# EAGLE board SmartWatchPCB (EAGLE 9.7.0)
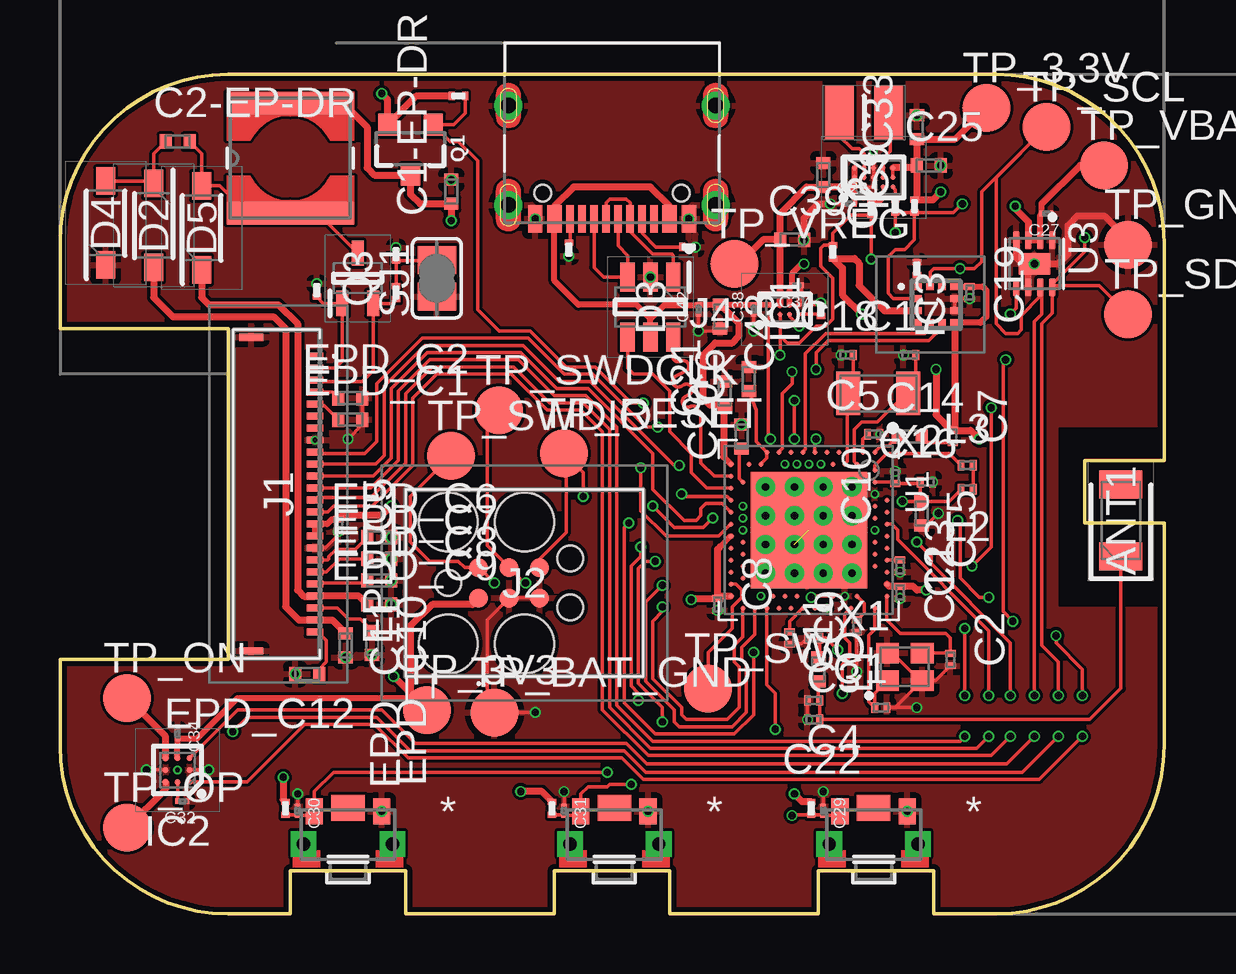
[diagram p0: board, top side]
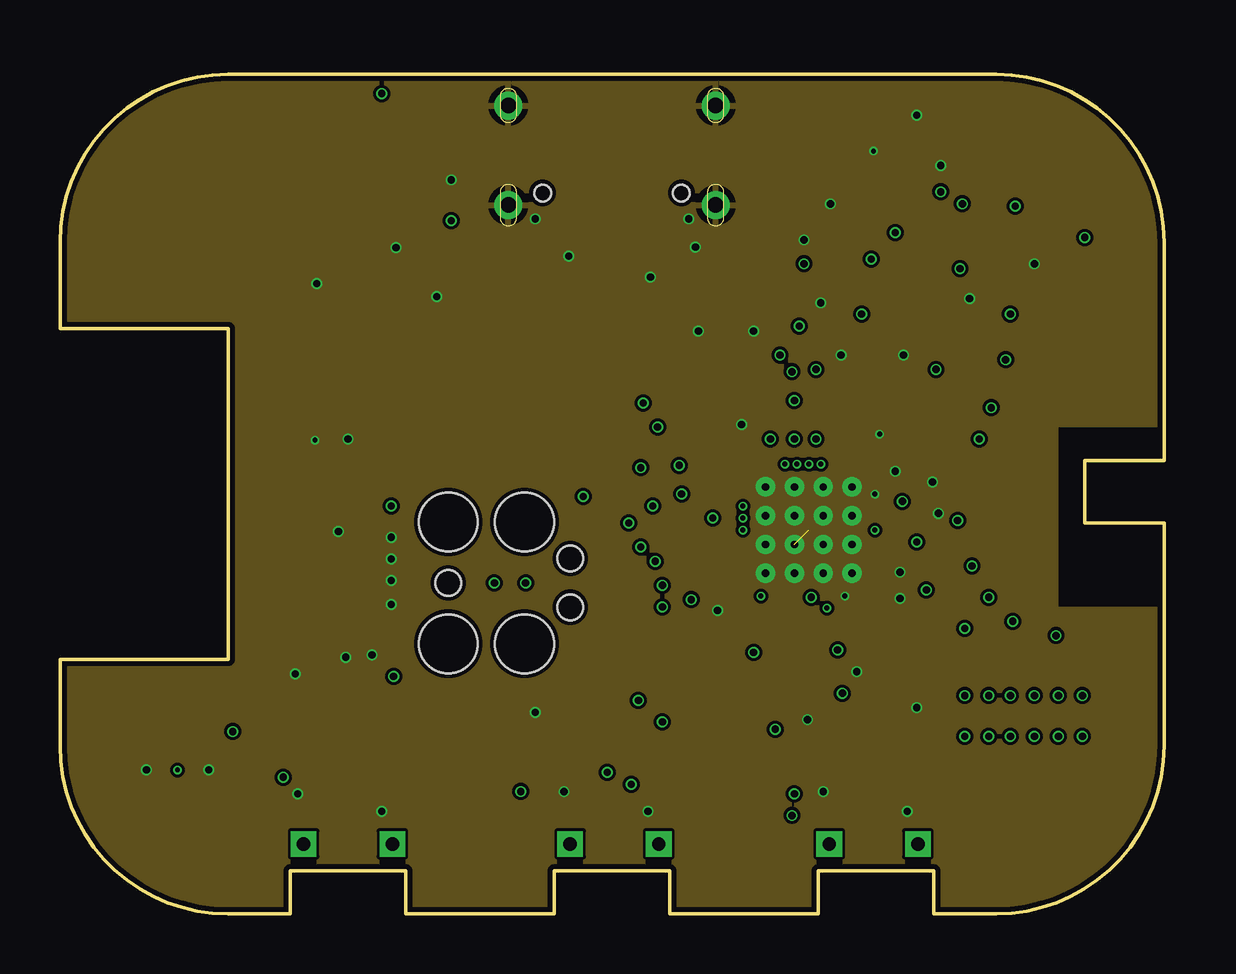
[diagram p1: board, inner layer Route2]
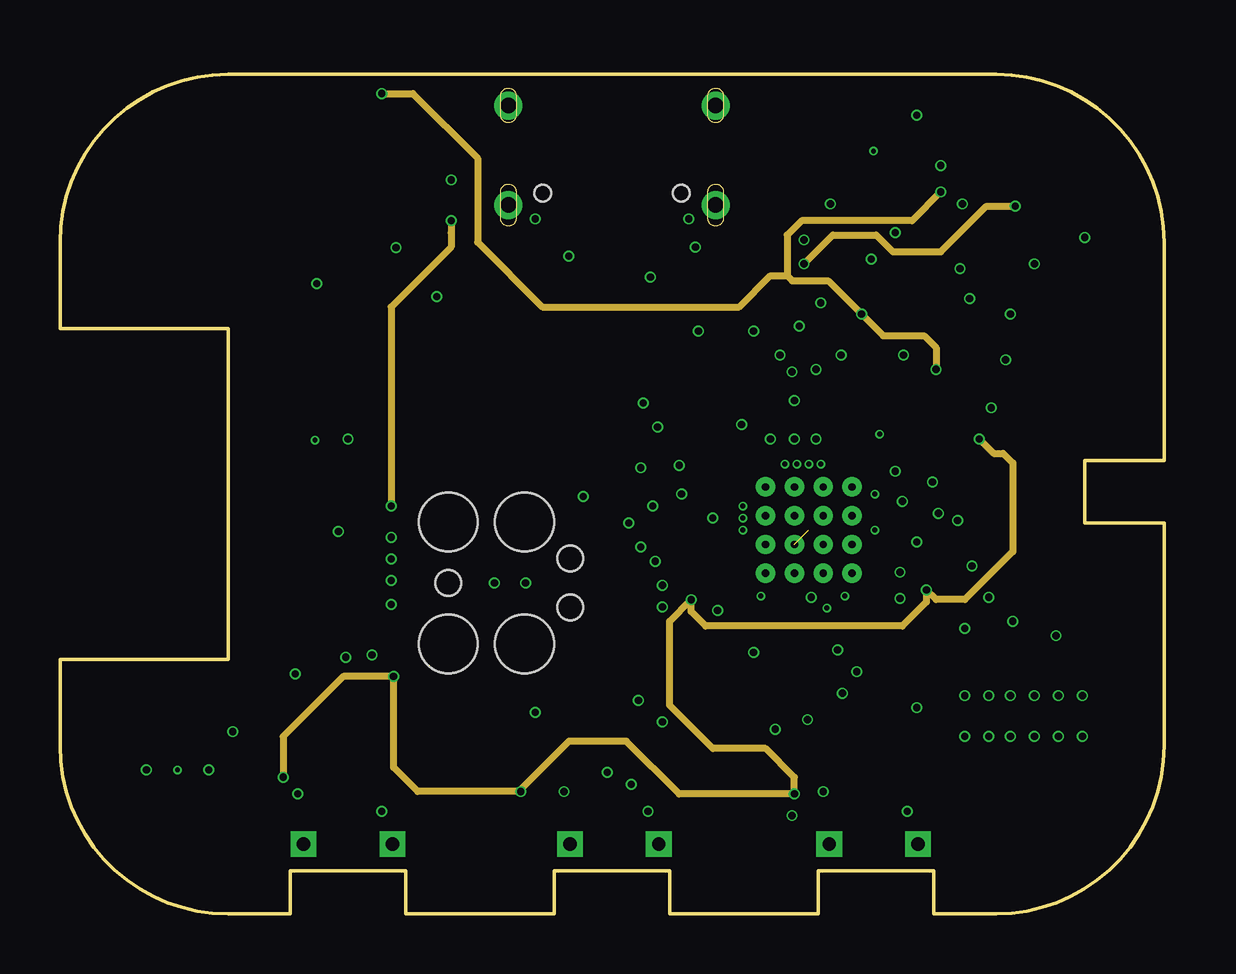
[diagram p2: board, inner layer Route15]
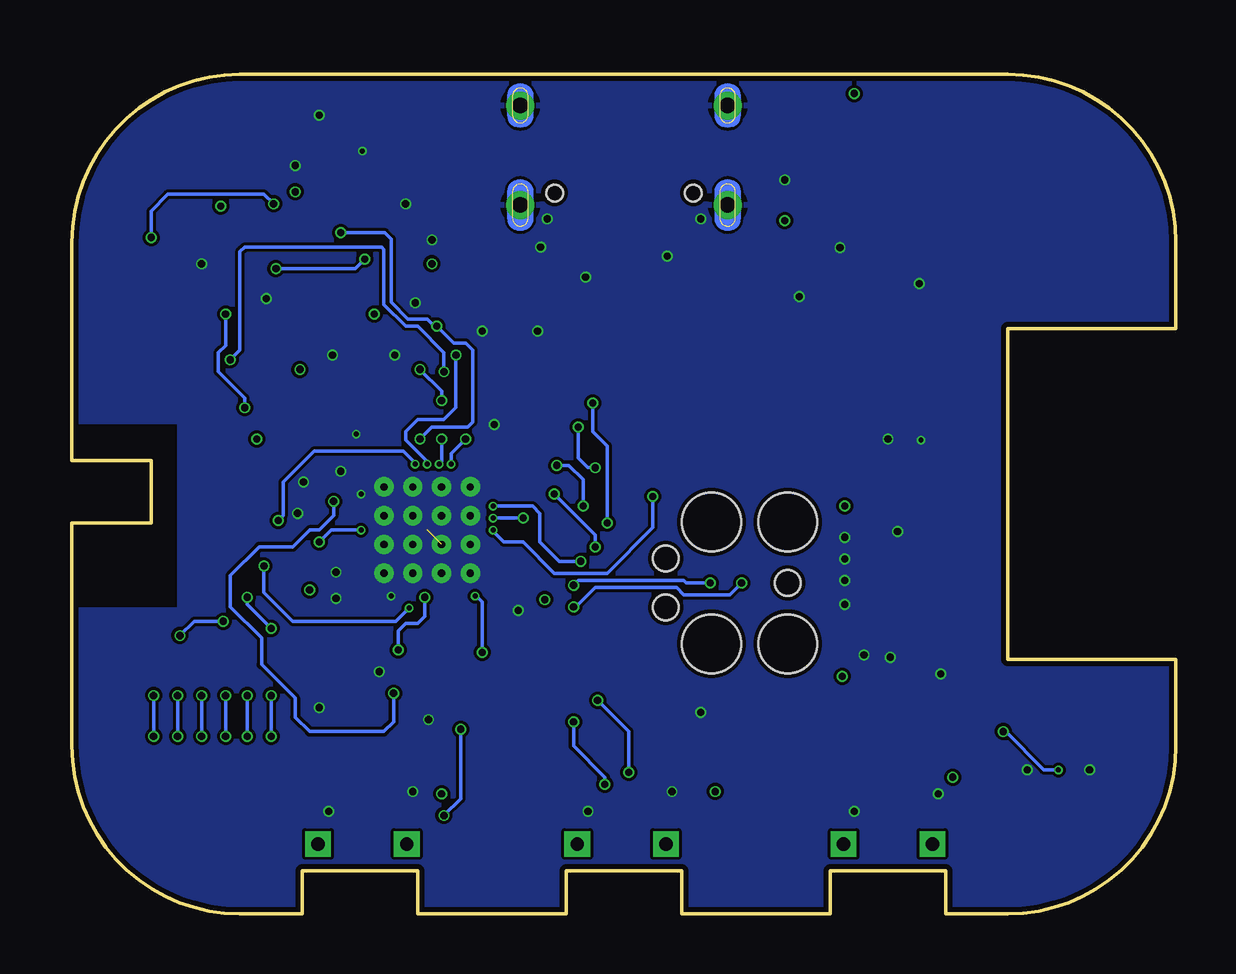
[diagram p3: board, bottom side, seen from below]

Size 46 x 35 mm. Coordinates in mm from the lower left corner, seen from the top.
Outline: 46,7 46,6.9
Outline: 46,7 46,16.3 42.7,16.3 42.7,18.9 46,18.9 46,28 arc90 39,35 7,35 arc90 0,28 0,24.4 7,24.4 7,10.6 0,10.6 0,7 arc90 7,0 9.6,0 9.6,1.8 14.4,1.8 14.4,0 20.6,0 20.6,1.8 25.4,1.8 25.4,0 31.6,0 31.6,1.8 36.4,1.8 36.4,0 39,0 arc90 46,7
Copper layers (1+2*15+16): Top 0.035mm / dielectric 1.6mm / Route2 0.035mm / dielectric 0.15mm / Route15 0.035mm / dielectric 0.2mm / Bottom 0.035mm
Design rules "jlcpcb-2layers.dru *": minimum track width 5mil, minimum drill 0.3mm, track to track 5mil, track to pad 5mil, pad to pad 5mil, via to via 5mil, smd to smd 5mil, copper to edge 0.2mm, drill to drill 6mil, minimum pad ring 10mil, minimum via ring 3mil, stop-mask expansion 4mil, vias tented up to drill 0mil, thermal gap 10mil

## Footprints (pad centres in the part's own frame; a part is rotated, then mirrored left to right if it is on the bottom)
2450AT18B100E_ANTC3216X140N = smd 1.15 x 1.8: 1 -1.5,0; 2 1.5,0
NORDIC_NRF_3_RESC0201_L = smd 0.28 x 0.43: 1 -0.255,0; 2 0.255,0
NORDIC_NRF_3_RESC0402_L = smd 0.5 x 0.6: 1 -0.5,0; 2 0.5,0
GRM011R60J152KE01L_2_CAPC0201X13N = smd 0.22 x 0.23: 1 -0.185,0; 2 0.185,0
ESP32_C6_LIBRARY_5_SOD3716X135N = smd 1.15 x 0.8: 1 -1.75,0; 2 1.75,0
ESP32_C6_LIBRARY_3_SOT95P280X145-6N = smd 1.2 x 0.6: 1 -1.25,0.95; 2 -1.25,0; 3 -1.25,-0.95; 4 1.25,-0.95; 5 1.25,0; 6 1.25,0.95
BQ25180YBGR_BGA8C40P2X4_100X155X50 = smd 0.2 x 0.2: A1 -0.2,0.6; A2 0.2,0.6; B1 -0.2,0.2; B2 0.2,0.2; C1 -0.2,-0.2; C2 0.2,-0.2; D1 -0.2,-0.6; D2 0.2,-0.6
DRV2605YZFR_BGA9C50P3X3_144X144X62 = smd 0.25 x 0.25: A1 -0.5,0.5; A2 0,0.5; A3 0.5,0.5; B1 -0.5,0; B2 0,0; B3 0.5,0; C1 -0.5,-0.5; C2 0,-0.5; C3 0.5,-0.5
BMA423_BMA423 = smd 0.3 x 0.35: 1 -0.75,-0.775; 2 -0.25,-0.775; 3 0.25,-0.775; 4 0.75,-0.775; 7 0.75,0.775; 8 0.25,0.775; 9 -0.25,0.775; 10 -0.75,0.775 | smd 0.35 x 0.3: 5 0.775,-0.25; 6 0.775,0.25; 11 -0.775,0.25; 12 -0.775,-0.25
RT6160AWSC_BGA15C40P3X5_140X230X60 = smd 0.216 x 0.216: A1 -0.4,0.8; A2 0,0.8; A3 0.4,0.8; B1 -0.4,0.4; B2 0,0.4; B3 0.4,0.4; C1 -0.4,0; C2 0,0; C3 0.4,0; D1 -0.4,-0.4; D2 0,-0.4; D3 0.4,-0.4; E1 -0.4,-0.8; E2 0,-0.8; E3 0.4,-0.8
503480-2400_5034802400 = smd 0.3 x 0.7: 1 -5.75,1.525; 2 -5.25,1.525; 3 -4.75,1.525; 4 -4.25,1.525; 5 -3.75,1.525; 6 -3.25,1.525; 7 -2.75,1.525; 8 -2.25,1.525; 9 -1.75,1.525; 10 -1.25,1.525; 11 -0.75,1.525; 12 -0.25,1.525; 13 0.25,1.525; 14 0.75,1.525; 15 1.25,1.525; 16 1.75,1.525; 17 2.25,1.525; 18 2.75,1.525; 19 3.25,1.525; 20 3.75,1.525; 21 4.25,1.525; 22 4.75,1.525; 23 5.25,1.525; 24 5.75,1.525 | smd 0.3 x 1: MP1 -6.54,-1.125; MP2 6.54,-1.125
TC2030-IDC_TC2030IDC = smd 0.783 x 0.783: 1 -0.953,-0.635; 2 -0.953,0.635; 3 0.317,-0.635; 4 0.317,0.635; 5 1.588,-0.635; 6 1.588,0.635 | hole 2.451: -2.223,-2.54; -2.223,2.54; 0.952,-2.54; 0.952,2.54 | hole 1.067: -2.223,0; 2.857,-1.016; 2.857,1.016
KH-TYPE-C-16P_KINGHELM_KH-TYPE-C-16P = smd 0.6 x 1.15: A1_B12 -3.2,4.725; A4_B9 -2.4,4.725; A9_B4 2.4,4.725; A12_B1 3.2,4.725 | smd 0.3 x 1.15: A5 -1.25,4.725; A6 -0.25,4.725; A7 0.25,4.725; A8 1.25,4.725; B5 1.75,4.725; B6 0.75,4.725; B7 -0.75,4.725; B8 -1.75,4.725 | drill 0.65 pad 1.05: SH1 -4.32,0; SH2 4.32,0; SH3 -4.32,4.15; SH4 4.32,4.15 | hole 0.7: -2.89,3.65; 2.89,3.65
NORDIC_NRF_2_RESC0402_L = smd 0.5 x 0.6: 1 -0.5,0; 2 0.5,0
NORDIC_NRF_2_RESC0201_L = smd 0.28 x 0.43: 1 -0.255,0; 2 0.255,0
ESP32_C6_LIBRARY_2_IND_4828-WE-TPC_WRE = smd 0.9 x 5.3: 1 -2.286,0; 2 2.286,0
MLP2016SR47MT0S1_INDC2016X100N = smd 1.2 x 2.2: 1 -1.028,0; 2 1.028,0
ESP32_C6_LIBRARY_4_ESP32_C6_LIBRARY_4_ESP32_C6_LIBRARY_4_ESP32_C6_LIBRARY_4_ESP32_WROVER_SPARKFUN-DISCRETESEMI_SOT23-3 = smd 0.8 x 0.9: 1 -0.95,-1; 2 0.95,-1; 3 0,1.1
ESP32_C6_LIBRARY_6_SOT65P210X110-3N = smd 1.05 x 0.5: 1 -1.05,0.65; 2 -1.05,-0.65; 3 1.05,0
CPF0201D7K68C1_0201 = smd 0.35 x 0.25: 1 0,0.275; 2 0,-0.275
ESP32_C6_LIBRARY_7_JUMPER_SJ = smd 1.168 x 1.6: 1 -0.762,0; 2 0.762,0
2025-10-22_07-23-44_LIBRARY_SW_EVP-AKE31A_PAN = smd 0.711 x 1.092: 1 -1.4,-0.972; 2 1.4,-0.972 | drill 0.559 pad 0.914 square: 3 -1.848,0.381; 4 1.848,0.381 | smd 1.397 x 1.092: 5 0,-1.124
HECTOR_WATCH_1_TP20R = smd 2 x 2: TP 0,0
NORDIC_NRF_4_AQFN50P700X700X85_HS-74N = smd 4.85 x 4.85: P$74 0,0 | drill 0.3 pad 0.6: P$75 -1.8,1.8; P$76 -0.6,1.8; P$77 0.6,1.8; P$78 1.8,1.8; P$79 -1.8,0.6; P$80 -0.6,0.6; P$81 0.6,0.6; P$82 1.8,0.6; P$83 -1.8,-0.6; P$84 -0.6,-0.6; P$85 0.6,-0.6; P$86 1.8,-0.6; P$87 -1.8,-1.8; P$88 -0.6,-1.8; P$89 0.6,-1.8; P$90 1.8,-1.8 | smd 0.2 x 0.2: P$A8 -1.25,3.25; P$A10 -0.75,3.25; P$A12 -0.25,3.25; P$A14 0.25,3.25; P$A16 0.75,3.25; P$A18 1.25,3.25; P$A20 1.75,3.25; P$A22 2.25,3.25; P$A23 2.75,3.25; P$AA24 3.25,-2.25; P$AB2 -2.75,-2.5; P$AC5 -2,-2.75; P$AC9 -1,-2.75; P$AC11 -0.5,-2.75; P$AC13 0,-2.75; P$AC15 0.5,-2.75; P$AC17 1,-2.75; P$AC19 1.5,-2.75; P$AC21 2,-2.75; P$AC24 3.25,-2.75; P$AD2 -2.75,-3.25; P$AD4 -2.25,-3.25; P$AD6 -1.75,-3.25; P$AD8 -1.25,-3.25; P$AD10 -0.75,-3.25; P$AD12 -0.25,-3.25; P$AD14 0.25,-3.25; P$AD16 0.75,-3.25; P$AD18 1.25,-3.25; P$AD20 1.75,-3.25; P$AD22 2.25,-3.25; P$AD23 2.75,-3.25; P$B1 -3.25,2.75; P$B3 -2.5,2.75; P$B5 -2,2.75; P$B7 -1.5,2.75; P$B9 -1,2.75; P$B11 -0.5,2.75; P$B13 0,2.75; P$B15 0.5,2.75; P$B17 1,2.75; P$B19 1.5,2.75; P$B24 3.25,2.75; P$C1 -3.25,2.25; P$D2 -2.75,2; P$D23 2.75,2; P$E24 3.25,1.75; P$F2 -2.75,1.5; P$F23 2.75,1.5; P$G1 -3.25,1.25; P$H2 -2.75,1; P$H23 2.75,1; P$J1 -3.25,0.75; P$J24 3.25,0.75; P$K2 -2.75,0.5; P$L1 -3.25,0.25; P$L24 3.25,0.25; P$M2 -2.75,0; P$N1 -3.25,-0.25; P$N24 3.25,-0.25; P$P2 -2.75,-0.5; P$P23 2.75,-0.5; P$R1 -3.25,-0.75; P$R24 3.25,-0.75; P$T2 -2.75,-1; P$T23 2.75,-1; P$U1 -3.25,-1.25; P$U24 3.25,-1.25; P$V23 2.75,-1.5; P$W1 -3.25,-1.75; P$W24 3.25,-1.75; P$Y2 -2.75,-2; P$Y23 2.75,-2
ESP32_C6_LIBRARY_SON50P200X200X80-9N = smd 0.76 x 0.27: 1 -0.985,0.75; 2 -0.985,0.25; 3 -0.985,-0.25; 4 -0.985,-0.75; 5 0.985,-0.75; 6 0.985,-0.25; 7 0.985,0.25; 8 0.985,0.75 | smd 0.9 x 1.3: 9 0,0
NORDIC_NRF_BT-XTAL_2016_N = smd 0.95 x 0.85: 1 -0.725,-0.575; 2 0.725,-0.575; 3 0.725,0.575; 4 -0.725,0.575
NORDIC_NRF_1_XTAL_3215_N = smd 1 x 1.8: 1 -1.25,0; 2 1.25,0

## Placement (x,y rotation side)
ANT1  2450AT18B100E  [2450AT18B100E_ANTC3216X140N]  44.2,16.4 90 top
C1  12pF  [NORDIC_NRF_3_RESC0201_L]  34.2,8.6 0 top
C1-EP-DR  10uF  [NORDIC_NRF_3_RESC0402_L]  16.3,30.1 90 top
C2  12pF  [NORDIC_NRF_3_RESC0201_L]  37.1,10.6 270 top
C2-EP-DR  4.7uF/25V  [NORDIC_NRF_3_RESC0402_L]  4.9,32.2 0 top
C3  1pF  [NORDIC_NRF_3_RESC0201_L]  31.4,11.5 180 top
C4  1pF  [NORDIC_NRF_3_RESC0201_L]  31.4,8.9 180 top
C5  100nF  [NORDIC_NRF_3_RESC0201_L]  33.9,20 0 top
C6  4.7uF  [NORDIC_NRF_3_RESC0402_L]  28.7,22.3 90 top
C7  100nF  [NORDIC_NRF_3_RESC0201_L]  37.2,19.9 270 top
C8  100nF  [NORDIC_NRF_3_RESC0201_L]  27.4,12.9 270 top
C9  820pF  [NORDIC_NRF_3_RESC0201_L]  30.4,11.5 270 top
C10  N.C.  [NORDIC_NRF_3_RESC0201_L]  34.8,18.2 90 top
C11  100pF  [NORDIC_NRF_3_RESC0201_L]  33.2,12 90 top
C12  100nF  [NORDIC_NRF_3_RESC0201_L]  35,13.4 270 top
C13  N.C.  [NORDIC_NRF_3_RESC0201_L]  35,14.5 270 top
C14  4.7uF  [NORDIC_NRF_3_RESC0402_L]  35.4,19.9 0 top
C15  1.0uF  [NORDIC_NRF_3_RESC0402_L]  35.9,16.7 270 top
C16  47nF  [NORDIC_NRF_3_RESC0201_L]  36.1,18 0 top
C17  12pF  [NORDIC_NRF_3_RESC0201_L]  35.4,23.3 0 top
C18  12pF  [NORDIC_NRF_3_RESC0201_L]  32.8,23.3 0 top
C19  100nF  [NORDIC_NRF_3_RESC0201_L]  37.9,25.9 270 top
C20  4.7uF  [NORDIC_NRF_3_RESC0402_L]  28.4,19.9 90 top
C21  4.7uF  [NORDIC_NRF_3_RESC0402_L]  27.7,21.7 90 top
C22  N.C.  [NORDIC_NRF_3_RESC0201_L]  31.4,8.1 180 top
C23  0.1uF  [GRM011R60J152KE01L_2_CAPC0201X13N]  32.9,29.6 0 top
C24  10uF  [NORDIC_NRF_3_RESC0402_L]  31.8,30.8 270 top
C25  22uF  [NORDIC_NRF_3_RESC0402_L]  36.2,31.2 0 top
C27  0.1uF  [GRM011R60J152KE01L_2_CAPC0201X13N]  41.1,29.2 180 top
C29  1uF  [GRM011R60J152KE01L_2_CAPC0201X13N]  31.8,4.3 270 top
C30  1uF  [GRM011R60J152KE01L_2_CAPC0201X13N]  9.9,4.3 270 top
C31  1uF  [GRM011R60J152KE01L_2_CAPC0201X13N]  21,4.3 270 top
C32  1uF  [GRM011R60J152KE01L_2_CAPC0201X13N]  5.1,4.7 180 top
C33  22uF  [NORDIC_NRF_3_RESC0402_L]  35.7,32.8 90 top
C34  0.1uF  [GRM011R60J152KE01L_2_CAPC0201X13N]  4.9,7.5 270 top
C37  1uF  [GRM011R60J152KE01L_2_CAPC0201X13N]  30.7,26.2 180 top
C38  1uF  [GRM011R60J152KE01L_2_CAPC0201X13N]  28.9,25.2 90 top
C39  10uF  [NORDIC_NRF_3_RESC0402_L]  30.5,28.1 0 top
C42  0.1uF  [GRM011R60J152KE01L_2_CAPC0201X13N]  26.6,25.2 90 top
C43  4.7uF  [NORDIC_NRF_3_RESC0402_L]  27.5,24.9 270 top
D2  MBR0530  [ESP32_C6_LIBRARY_5_SOD3716X135N]  3.9,28.7 270 top
D3  USBLC6-2SC6Y  [ESP32_C6_LIBRARY_3_SOT95P280X145-6N]  24.6,25.3 270 top
D4  MBR0530  [ESP32_C6_LIBRARY_5_SOD3716X135N]  1.9,28.8 90 top
D5  MBR0530  [ESP32_C6_LIBRARY_5_SOD3716X135N]  5.9,28.6 90 top
EPD_C1  1uF/50V  [NORDIC_NRF_3_RESC0402_L]  12.1,20.6 0 top
EPD_C2  1uF/50V  [NORDIC_NRF_3_RESC0402_L]  12.1,21.5 0 top
EPD_C5  0.1uF/50V  [NORDIC_NRF_3_RESC0201_L]  11.6,16.2 270 top
EPD_C6  1uF/50V  [NORDIC_NRF_3_RESC0402_L]  13.3,15.7 0 top
EPD_C7  1uF/50V  [NORDIC_NRF_3_RESC0402_L]  13.3,14.8 0 top
EPD_C8  1uF/50V  [NORDIC_NRF_3_RESC0402_L]  13.3,13.9 0 top
EPD_C9  1uF/50V  [NORDIC_NRF_3_RESC0402_L]  13.3,12.9 0 top
EPD_C10  1uF/50V  [NORDIC_NRF_3_RESC0402_L]  13,11.3 270 top
EPD_C11  1uF/50V  [NORDIC_NRF_3_RESC0402_L]  11.9,11.2 270 top
EPD_C12  1uF/50V  [NORDIC_NRF_3_RESC0402_L]  10.3,10 180 top
IC1  BQ25180YBGR  [BQ25180YBGR_BGA8C40P2X4_100X155X50]  30.2,25.2 90 top
IC2  DRV2605YZFR  [DRV2605YZFR_BGA9C50P3X3_144X144X62]  4.9,6 180 top
IC3  BMA423_BMA423  [BMA423_BMA423]  36.5,25.4 270 top
IC9  RT6160AWSC  [RT6160AWSC_BGA15C40P3X5_140X230X60]  33.9,30.7 90 top
J1  503480-2400  [503480-2400_5034802400]  9.1,17.5 270 top
J2  TC2030-IDC  [TC2030-IDC_TC2030IDC]  18.4,13.8 0 top
J4  KH-TYPE-C-16P  [KH-TYPE-C-16P_KINGHELM_KH-TYPE-C-16P]  23,33.7 180 top
L1  3.9nH  [NORDIC_NRF_2_RESC0402_L]  31.6,10.2 270 top
L2  10uH  [NORDIC_NRF_2_RESC0201_L]  37.8,18.7 0 top
L3  15nH  [NORDIC_NRF_2_RESC0201_L]  37.8,17.7 180 top
L5  48uH  [ESP32_C6_LIBRARY_2_IND_4828-WE-TPC_WRE]  9.6,31.5 90 top
L7  FTC252012SR47MBCA  [MLP2016SR47MT0S1_INDC2016X100N]  33.5,33.4 0 top
Q1  20V/4.2A/52mΩ/1.4W  [ESP32_C6_LIBRARY_4_ESP32_C6_LIBRARY_4_ESP32_C6_LIBRARY_4_ESP32_C6_LIBRARY_4_ESP32_WROVER_SPARKFUN-DISCRETESEMI_SOT23-3]  14.6,31.9 180 top
Q3  SI1308EDL-T1-GE3  [ESP32_C6_LIBRARY_6_SOT65P210X110-3N]  12.4,26.5 90 top
R1_EP_DR  0.47  [CPF0201D7K68C1_0201]  14,25.9 0 top
R1_USB  5K1  [CPF0201D7K68C1_0201]  26.2,27.8 270 top
R2  0  [CPF0201D7K68C1_0201]  34.8,29.5 180 top
R2_EP_DR  10k  [CPF0201D7K68C1_0201]  10.7,26 0 top
R2_USB  5K1  [CPF0201D7K68C1_0201]  21.2,27.7 0 top
R3  0  [CPF0201D7K68C1_0201]  35.7,26.9 0 top
R4  0  [CPF0201D7K68C1_0201]  33.8,29.4 180 top
R5  10k  [CPF0201D7K68C1_0201]  9.4,4.4 180 top
R7  10k  [CPF0201D7K68C1_0201]  31.3,4.4 180 top
R8  10k  [CPF0201D7K68C1_0201]  20.5,4.4 180 top
R9  10K  [CPF0201D7K68C1_0201]  31.7,25.2 0 top
R17  3k3  [CPF0201D7K68C1_0201]  32.2,27.6 180 top
R18  3K3  [CPF0201D7K68C1_0201]  35.6,29.5 0 top
R_PWR_EPD  10k  [CPF0201D7K68C1_0201]  16.6,34.1 270 top
R_TYPE_SEL  2.2  [CPF0201D7K68C1_0201]  14,27.5 0 top
SJ1  [ESP32_C6_LIBRARY_7_JUMPER_SJ]  15.7,26.5 90 top
SW_DN  EVP-AKE31A_PAN  [2025-10-22_07-23-44_LIBRARY_SW_EVP-AKE31A_PAN]  33.9,3.3 180 top
SW_ENT  EVP-AKE31A_PAN  [2025-10-22_07-23-44_LIBRARY_SW_EVP-AKE31A_PAN]  23.1,3.3 180 top
SW_UP  EVP-AKE31A_PAN  [2025-10-22_07-23-44_LIBRARY_SW_EVP-AKE31A_PAN]  12,3.3 180 top
TP_3.3V  HECTOR_WATCH_1_TPTP20R  [HECTOR_WATCH_1_TP20R]  38.6,33.6 0 top
TP_3V3  HECTOR_WATCH_1_TPTP20R  [HECTOR_WATCH_1_TP20R]  15.3,8.5 0 top
TP_BAT_GND  HECTOR_WATCH_1_TPTP20R  [HECTOR_WATCH_1_TP20R]  18.1,8.4 0 top
TP_GND  HECTOR_WATCH_1_TPTP20R  [HECTOR_WATCH_1_TP20R]  44.5,27.9 0 top
TP_ON  HECTOR_WATCH_1_TPTP20R  [HECTOR_WATCH_1_TP20R]  2.8,9 0 top
TP_OP  HECTOR_WATCH_1_TPTP20R  [HECTOR_WATCH_1_TP20R]  2.8,3.6 0 top
TP_RESET  HECTOR_WATCH_1_TPTP20R  [HECTOR_WATCH_1_TP20R]  21,19.2 0 top
TP_SCL  HECTOR_WATCH_1_TPTP20R  [HECTOR_WATCH_1_TP20R]  41.1,32.8 0 top
TP_SDA  HECTOR_WATCH_1_TPTP20R  [HECTOR_WATCH_1_TP20R]  44.5,25 0 top
TP_SWDCLK  HECTOR_WATCH_1_TPTP20R  [HECTOR_WATCH_1_TP20R]  18.3,21 0 top
TP_SWDIO  HECTOR_WATCH_1_TPTP20R  [HECTOR_WATCH_1_TP20R]  16.3,19.1 0 top
TP_SWO  HECTOR_WATCH_1_TPTP20R  [HECTOR_WATCH_1_TP20R]  27,9.4 0 top
TP_VBAT  HECTOR_WATCH_1_TPTP20R  [HECTOR_WATCH_1_TP20R]  43.5,31.2 0 top
TP_VREG  HECTOR_WATCH_1_TPTP20R  [HECTOR_WATCH_1_TP20R]  28.1,27.1 0 top
U1  NRF52840_QF  [NORDIC_NRF_4_AQFN50P700X700X85_HS-74N]  31.2,16 270 top
U3  MAX17048G+T10  [ESP32_C6_LIBRARY_SON50P200X200X80-9N]  40.6,27.1 270 top
X1  32MHz  [NORDIC_NRF_BT-XTAL_2016_N]  35.2,10.3 0 top
X2  32.768kHz  [NORDIC_NRF_1_XTAL_3215_N]  34.1,21.7 180 top

## Library data of the parts
ANT1 = InkTime_v5; ARROW_PART_NUMBER: 2450AT18B100E; ARROW_PRICE-STOCK: https://www.arrow.com/en/products/2450at18b100e/johanson-dielectrics?utm_currency=USD&region=nac; DESCRIPTION: Antennas 2.45GHz ANTENNA; HEIGHT: 1.4mm; MANUFACTURER_NAME: JOHANSON TECHNOLOGY; MANUFACTURER_PART_NUMBER: 2450AT18B100E; MOUSER_PART_NUMBER: 609-2450AT18B100E; MOUSER_PRICE-STOCK: https://www.mouser.co.uk/ProductDetail/Johanson-Technology/2450AT18B100E?qs=yCnrNFeXz%252Bh5MFsFIXGZGA%3D%3D
C1 C1-EP-DR C2 C2-EP-DR C3-C22 C24 C25 C33 C39 C43 EPD_C1 EPD_C2 EPD_C5-EPD_C12 L1-L3 R1_EP_DR R1_USB R2 R2_EP_DR R2_USB R3-R5 R7-R9 R17 R18 R_PWR_EPD R_TYPE_SEL SJ1 TP_3.3V TP_3V3 TP_BAT_GND TP_GND TP_ON TP_OP TP_RESET TP_SCL TP_SDA TP_SWDCLK TP_SWDIO TP_SWO TP_VBAT TP_VREG U1 X1 X2 = InkTime_v5
C23 C27 C29-C32 C34 C37 C38 C42 = InkTime_v5; AVAILABILITY: In Stock; CHECK_PRICES: https://www.snapeda.com/parts/GRM011R60J152KE01L/Murata/view-part/?ref=eda; DESCRIPTION: SMD Capacitor X5R(EIA) with Capacitance: 1500pF Tol. 10%. Rated Voltage: 6.3Vdc; MF: Murata; MP: GRM011R60J152KE01L; PACKAGE: 0201 Murata; PRICE: None; SNAPEDA_LINK: https://www.snapeda.com/parts/GRM011R60J152KE01L/Murata/view-part/?ref=snap
D2 D4 D5 = InkTime_v5; AVAILABILITY: In Stock; CHECK_PRICES: https://www.snapeda.com/parts/MBR0530/Onsemi/view-part/?ref=eda; DESCRIPTION: Diode Schottky 30 V 500mA Surface Mount SOD-123; MF: ON Semiconductor; MP: MBR0530; PACKAGE: SOD-123-2 ON Semiconductor; PRICE: None; PURCHASE-URL: https://www.snapeda.com/api/url_track_click_mouser/?unipart_id=179458&manufacturer=ON Semiconductor&part_name=MBR0530&search_term=None; SNAPEDA_LINK: https://www.snapeda.com/parts/MBR0530/Onsemi/view-part/?ref=snap
D3 = InkTime_v5; AVAILABILITY: In Stock; CHECK_PRICES: https://www.snapeda.com/parts/USBLC6-2SC6Y/STMicroelectronics/view-part/?ref=eda; DESCRIPTION: 17V Clamp 5A (8/20µs) Ipp Tvs Diode Surface Mount SOT-23-6; MF: STMicroelectronics; MP: USBLC6-2SC6Y; PACKAGE: SOT-23-6 STMicroelectronics; PRICE: None; SNAPEDA_LINK: https://www.snapeda.com/parts/USBLC6-2SC6Y/STMicroelectronics/view-part/?ref=snap
IC1 = InkTime_v5; ARROW_PART_NUMBER: BQ25180YBGR; ARROW_PRICE-STOCK: https://www.arrow.com/en/products/bq25180ybgr/texas-instruments?utm_currency=USD&region=nac; DESCRIPTION: Charger IC Lithium Ion/Polymer, Lithium Iron Phosphate 8-DSBGA (1.6x1.1); HEIGHT: 0.5mm; MANUFACTURER_NAME: Texas Instruments; MANUFACTURER_PART_NUMBER: BQ25180YBGR; MOUSER_PART_NUMBER: 595-BQ25180YBGR; MOUSER_PRICE-STOCK: https://www.mouser.co.uk/ProductDetail/Texas-Instruments/BQ25180YBGR?qs=doiCPypUmgEWjAK%252BJAX6Tw%3D%3D
IC2 = InkTime_v5; ARROW_PART_NUMBER: DRV2605YZFR; ARROW_PRICE-STOCK: https://www.arrow.com/en/products/drv2605yzfr/texas-instruments?region=nac; DESCRIPTION: Haptic Driver for ERM/LRA with Built-In Library and Smart Loop Architecture; HEIGHT: 0.625mm; MANUFACTURER_NAME: Texas Instruments; MANUFACTURER_PART_NUMBER: DRV2605YZFR
IC3 = InkTime_v5; ARROW_PART_NUMBER: BMA423; ARROW_PRICE-STOCK: https://www.arrow.com/en/products/bma423/bosch; DESCRIPTION: Accelerometers Triaxial low-g 12bit Acceleration Sensor; HEIGHT: 1mm; MANUFACTURER_NAME: BOSCH; MANUFACTURER_PART_NUMBER: BMA423; MOUSER_PART_NUMBER: 262-BMA423; MOUSER_PRICE-STOCK: https://www.mouser.co.uk/ProductDetail/Bosch-Sensortec/BMA423?qs=HXFqYaX1Q2xC%252BSgeGoX3mg%3D%3D
IC9 = InkTime_v5; DESCRIPTION: Buck-Boost Regulator Positive Output Step-Up/Step-Down I2C DC-DC Controller IC 15-WL-CSP (BSC) (1.4x2.3); HEIGHT: 0.6mm; MANUFACTURER_NAME: RICHTEK; MANUFACTURER_PART_NUMBER: RT6160AWSC; MOUSER_PART_NUMBER: 835-RT6160AWSC; MOUSER_PRICE-STOCK: https://www.mouser.co.uk/ProductDetail/Richtek/RT6160AWSC?qs=amGC7iS6iy%2FLd9PSoixZXQ%3D%3D
J1 = InkTime_v5; DESCRIPTION: FFC & FPC Connectors 0.5mm FPC RA SMT Dual Contact 24Ckt; HEIGHT: 1.87mm; MANUFACTURER_NAME: Molex; MANUFACTURER_PART_NUMBER: 503480-2400; MOUSER_PART_NUMBER: 538-503480-2400; MOUSER_PRICE-STOCK: https://www.mouser.co.uk/ProductDetail/Molex/503480-2400?qs=OAhjpuo3Vu7efIoxFh9AOw%3D%3D
J2 = InkTime_v5; DESCRIPTION: CABLE ADAPTER 6 POS; HEIGHT: 19mm; MANUFACTURER_NAME: Tag Connect; MANUFACTURER_PART_NUMBER: TC2030-IDC
J4 = InkTime_v5; AVAILABILITY: Not in stock; CHECK_PRICES: https://www.snapeda.com/parts/KH-TYPE-C-16P/Kinghelm/view-part/?ref=eda; MF: kinghelm; MP: KH-TYPE-C-16P; PACKAGE: None; PRICE: None; SNAPEDA_LINK: https://www.snapeda.com/parts/KH-TYPE-C-16P/Kinghelm/view-part/?ref=snap
L5 = InkTime_v5; COPYRIGHT: Copyright (C) 2024 Ultra Librarian. All rights reserved.; MANUFACTURER_PART_NUMBER: 744043680; MFR_NAME: Wurth Electronics
L7 = InkTime_v5; DESCRIPTION: SMD / SMT Inductors (Coils), L=0.47?H, L x W x T :; HEIGHT: 1mm; JLCPCB: https://jlcpcb.com/partdetail/6763488-FTC252012SR47MBCA/C5832368; MANUFACTURER_NAME: TDK; MANUFACTURER_PART_NUMBER: FTC252012SR47MBCA
Q1 = InkTime_v5; PROD_ID: TRAN-14388
Q3 = InkTime_v5; AVAILABILITY: In Stock; CHECK_PRICES: https://www.snapeda.com/parts/SI1308EDL-T1-GE3/Vishay+Siliconix/view-part/?ref=eda; DESCRIPTION: Si1308EDL-T1-GE3 N-channel MOSFET Transistor, 1.5 A, 30 V, 3-Pin SC-70 | Siliconix / Vishay SI1308EDL-T1-GE3; MF: Vishay Siliconix; MP: SI1308EDL-T1-GE3; PACKAGE: SOT-323 Vishay Semiconductor; PRICE: None; PURCHASE-URL: https://www.snapeda.com/api/url_track_click_mouser/?unipart_id=274603&manufacturer=Vishay Siliconix&part_name=SI1308EDL-T1-GE3&search_term=None; SNAPEDA_LINK: https://www.snapeda.com/parts/SI1308EDL-T1-GE3/Vishay+Siliconix/view-part/?ref=snap
SW_DN SW_ENT SW_UP = InkTime_v5; COPYRIGHT: Copyright (C) 2025 Ultra Librarian. All rights reserved.; DIGI-KEY_PART_NUMBER_1: P123437TR-ND; DIGI-KEY_PART_NUMBER_2: P123437CT-ND; DIGI-KEY_PART_NUMBER_3: P123437DKR-ND; MANUFACTURER_NAME: Panasonic; MANUFACTURER_PART_NUMBER: EVP-AKE31A
U3 = InkTime_v5; AVAILABILITY: In Stock; CHECK_PRICES: https://www.snapeda.com/parts/MAX17048G+T10/Analog+Devices/view-part/?ref=eda; DESCRIPTION: 3µA 1-Cell/2-Cell Fuel Gauge with ModelGauge; MF: Analog Devices; MP: MAX17048G+T10; PACKAGE: TDFN-8 Maxim; PRICE: None; PURCHASE-URL: https://www.snapeda.com/api/url_track_click_mouser/?unipart_id=329239&manufacturer=Analog Devices&part_name=MAX17048G+T10&search_term=None; SNAPEDA_LINK: https://www.snapeda.com/parts/MAX17048G+T10/Analog+Devices/view-part/?ref=snap

## Nets
3V3: C7.1 C8.1 C12.1 C19.1 C25.1 C33.1 C34.2 IC2.C2 IC3.3 IC3.7 IC3.10 IC9.E2 IC9.E3 J2.1 Q1.2 R5.2 R7.2 R8.2 R17.1 R18.1 R_PWR_EPD.2 TP_3.3V.TP TP_3V3.TP U1.P$A22 U1.P$AD14 U1.P$AD23
ALERT: U1.P$J24 U3.5
D+: D3.4 U1.P$AD6
D-: D3.6 U1.P$AD4
DEC1: C5.1 U1.P$C1
DN: D3.1 J4.A7 J4.B7
DP: D3.3 J4.A6 J4.B6
EPD_3V3: C1-EP-DR.1 EPD_C5.1 J1.15 J1.16 L5.2 Q1.3
EPD_BUSY: J1.9 U1.P$AD12
EPD_CS: J1.12 U1.P$K2
EPD_DC: J1.11 U1.P$AD10
EPD_RST: J1.10 U1.P$AC11
GDR: J1.2 Q3.1 R2_EP_DR.2
GND: C1-EP-DR.2 C1.2 C2.2 C3.2 C4.2 C5.2 C6.2 C8.2 C9.2 C10.2 C11.1 C12.2 C13.2 C15.2 C16.2 C17.1 C18.1 C19.2 C20.2 C21.2 C22.2 C23.1 C24.1 C25.2 C27.1 C29.1 C30.1 C31.1 C32.1 C33.2 C34.1 C37.1 C38.1 C39.2 C42.1 C43.2 D3.2 D4.1 EPD_C1.2 EPD_C2.2 EPD_C5.2 EPD_C6.2 EPD_C7.2 EPD_C8.2 EPD_C9.2 EPD_C10.2 EPD_C11.2 EPD_C12.2 IC1.D2 IC2.B1 IC2.B3 IC3.8 IC3.9 IC9.B1 IC9.C1 IC9.C2 IC9.C3 J1.8 J1.17 J1.MP1 J1.MP2 J2.3 J2.5 J4.A1_B12 J4.A12_B1 J4.SH1 J4.SH2 J4.SH3 J4.SH4 R1_USB.1 R2_EP_DR.1 R2_USB.2 R3.1 R9.1 R_TYPE_SEL.1 SJ1.1 SW_DN.1 SW_ENT.1 SW_UP.1 TP_BAT_GND.TP TP_GND.TP U1.P$74 U1.P$75 U1.P$76 U1.P$77 U1.P$78 U1.P$79 U1.P$80 U1.P$81 U1.P$82 U1.P$83 U1.P$84 U1.P$85 U1.P$86 U1.P$87 U1.P$88 U1.P$89 U1.P$90 U1.P$B7 U1.P$F23 U3.1 U3.4 U3.6 U3.9 X1.2 X1.4
HAPTIC_EN: IC2.A1 U1.P$U1
IMU_INT1: IC3.5 U1.P$N1
IMU_INT2: IC3.6 U1.P$P2
LX1: IC9.B2 IC9.B3 L7.1
LX2: IC9.D2 IC9.D3 L7.2
MOSI: J1.14 U1.P$B13
N$1: IC1.D1 R9.2
N$3: IC9.D1 R4.2
N$4: IC9.E1 R2.2
N$5: IC3.1 R3.2
N$8: C20.1 U1.P$AC5
N$15: C17.2 U1.P$D2 X2.1
N$17: C18.2 U1.P$F2 X2.2
N$18: C6.1 U1.P$W1 U1.P$Y2
N$20: C7.2 C14.2
N$21: C14.1 U1.P$B1
N$22: L2.1 U1.P$B3
N$23: L2.2 L3.1
N$24: C10.1 C15.1 C16.1 L3.2 U1.P$B5 U1.P$E24
N$25: C1.1 U1.P$B24 X1.1
N$26: C2.1 U1.P$A23 X1.3
N$27: C11.2 U1.P$D23
N$28: C3.1 L1.1 U1.P$H23
N$29: ANT1.1 C4.1 C22.1 L1.2
N$30: C9.1 U1.P$N24
N$31: C2-EP-DR.2 D5.2 L5.1 Q3.3
N$32: C2-EP-DR.1 D2.1 D4.2
N$36: EPD_C1.1 J1.5
N$39: C13.1 U1.P$A18
N$41: R1_EP_DR.1 R_TYPE_SEL.2 SJ1.2
N$42: EPD_C2.1 J1.4
N$46: U1.P$AC19
N$52: C32.2 IC2.A2
N$57: J4.B5 R2_USB.1
N$62: J4.A5 R1_USB.2
N$64: EPD_C6.1 J1.18
N$65: EPD_C7.1 J1.19
N$66: EPD_C8.1 J1.20
N$68: EPD_C10.1 J1.22
N$70: EPD_C12.1 J1.24
OUT+: IC2.A3 TP_OP.TP
OUT-: IC2.C3 TP_ON.TP
P0.04: U1.P$J1
P0.09: U1.P$L24
P0.13: C30.2 R5.1 SW_UP.2 U1.P$AD8
P0.14: C31.2 R8.1 SW_ENT.2 U1.P$AC9
P0.19: U1.P$AC15
P0.20: U1.P$AD16
P0.21: U1.P$AC17
P0.22: U1.P$AD18
P0.24: U1.P$AD20
P0.25: U1.P$AC21
P0.26: U1.P$G1
P0.27: U1.P$H2
P0.28: U1.P$B11
P0.29: U1.P$A10
P0.30: U1.P$B9
P0.31: U1.P$A8
P1.01: Q1.1 R_PWR_EPD.1 U1.P$Y23
P1.02: C29.2 R7.1 SW_DN.2 U1.P$W24
P1.03: U1.P$V23
P1.04: U1.P$U24
P1.05: U1.P$T23
P1.06: U1.P$R24
P1.07: U1.P$P23
P1.09: U1.P$R1
P1.10: U1.P$A20
P1.11: U1.P$B19
P1.12: U1.P$B17
P1.13: U1.P$A16
P1.14: U1.P$B15
P1.15: U1.P$A14
PMIC_INT: IC1.A1 U1.P$T2
PREVGH: D5.1 EPD_C9.1 J1.21
PREVGL: D2.2 EPD_C11.1 J1.23
RESE: J1.3 Q3.2 R1_EP_DR.2
RESET: J2.6 TP_RESET.TP U1.P$AC13
SCK: J1.13 U1.P$A12
SCL: IC1.B1 IC2.C1 IC3.12 R4.1 R17.2 TP_SCL.TP U1.P$M2 U3.7
SDA: IC1.C1 IC2.B2 IC3.2 R2.1 R18.2 TP_SDA.TP U1.P$L1 U3.8
SWDCLK: J2.4 TP_SWDCLK.TP U1.P$AA24
SWDIO: J2.2 TP_SWDIO.TP U1.P$AC24
SWO: TP_SWO.TP U1.P$AD22
VBAT: C27.2 C37.2 IC1.C2 TP_VBAT.TP U3.2 U3.3
VBUS: C21.1 C38.2 C42.2 C43.1 D3.5 IC1.A2 J4.A4_B9 J4.A9_B4 U1.P$AD2
VREG: C23.2 C24.2 C39.1 IC1.B2 IC9.A1 IC9.A2 IC9.A3 TP_VREG.TP

## Tracks (layer width: path | path; a pad name or v marks a point on that pad's centre or on a via)
3V3  (via drill 0.3)
  Top 0.152: IC9.E3 IC9.E2 | U1.P$AD23
  Top 0.24: IC3.10 C19.1 38.45,26.16 38.6,26 38.6,24.9 38.35,24.65 IC3.7 | IC2.C2 4.89,6.52 C34.2 5.68,7.31 5.7,7.3 7.4,9 14.8,9 TP_3V3.TP | U1.P$AD14 27.5,15.3
  Top 0.3: U1.P$A22 34.55,13.65 C12.1 35.55,13.65 35.7,13.5 v36.1,13.5 | C8.1 27.5,13.25 U1.P$AD23 | C7.1 37.27,20.16 IC3.7 | R_PWR_EPD.2 14.85,34.1 Q1.2 13.65,33.95 v13.4,34.2 | J2.1 17.18,12.9 15.5,12.9 14.6,12 14.6,9.2 TP_3V3.TP v13.9,9.9 | C25.1 C33.1 37.3,32.3 TP_3.3V.TP | C25.1 35.7,29.88 R18.1 36.38,29.77 v36.7,30.1 | v9.3,5.7 9.3,4.78 R5.2 | R8.2 20.07,5.1 v19.2,5.1 | R7.2 30.93,4.68 v30.6,5 | C8.1 27.4,15.2 27.5,15.3 | C7.1 37.95,20.16 v38.3,19.8 | v26.3,13.1 26.36,13.16 C8.1 | IC3.3 34.35,25.15 33.3,26.2 33.3,27.12 33.1,27.32 R17.1 32.6,26.93 32.6,25.8 v33.4,25 | v36.5,22.7 36.5,20.8 37.14,20.16 C7.1 | C25.1 35.6,31.1 IC9.E3
  Route15 0.3: v9.3,5.7 9.3,7.4 11.8,9.9 v13.9,9.9 13.9,6.1 14.9,5.1 v19.2,5.1 19.2,5.2 21.2,7.2 23.6,7.2 25.8,5 v30.6,5 30.6,5.7 29.4,6.9 27.2,6.9 25.4,8.7 25.4,12.2 v26.3,13.1 26.3,12.6 26.9,12 35.1,12 36.1,13 v36.1,13.5 36.5,13.1 37.7,13.1 39.7,15.1 39.7,18.8 39.3,19.2 38.9,19.2 v38.3,19.8 | v36.5,22.7 36.5,23.6 36,24.1 34.3,24.1 v33.4,25 32,26.4 30.5,26.4 30.3,26.6 | v36.7,30.1 35.5,28.9 30.9,28.9 30.3,28.3 30.3,26.6 | v13.4,34.2 14.7,34.2 17.4,31.5 17.4,28 20.1,25.3 28.3,25.3 29.6,26.6 30.3,26.6
ALERT  (via drill 0.2, 0.3)
  Top 0.15: v38,14.5 38.8,15.3 v38.8,21.1 | U3.5 39.85,25.25 v39.6,25
  Bottom 0.15: v38,14.5 38,13.4 36.8,12.2 32.5,12.2 U1.P$J24 | v39.6,25 39.6,23.7 39.9,23.4 39.9,22.6 38.8,21.5 v38.8,21.1
  other vias: 31.95,12.75
D+
  Top 0.152: D3.4 23.65,22.75 23.9,22.5 24.7,22.5 25.4,21.8 25.4,20.1 26.3,19.2 26.3,18.4 26.95,17.75 U1.P$AD6
D-
  Top 0.152: D3.6 25.55,23.15 arc90 25.86,23.04 arc-90 26.18,22.93 arc-90 26.07,22.62 25.65,22.41 arc90 25.54,22.1 arc90 25.86,21.99 26,22.06 arc-90 26.32,21.95 arc-90 26.21,21.64 26.06,21.57 arc90 25.95,21.25 arc90 26.27,21.15 arc-90 26.58,21.04 26.7,20.8 26.7,18.8 27.25,18.25 U1.P$AD4
DEC1
  Top 0.152: C5.1 33.45,19.8 U1.P$C1
DN
  Top 0.152: J4.A7 22.75,29.65 22.9,29.8 23.6,29.8 23.75,29.65 J4.B7 23.75,28.45 24.7,27.5 25.5,27.5 25.55,27.45 D3.1
DP
  Top 0.152: J4.A6 23.25,27.85 23.65,27.45 D3.3 22.65,26.55 22.25,26.95 J4.B6
EPD_3V3  (via drill 0.3)
  Top 0.152: 10.64,15.74 J1.16
  Top 0.24: EPD_C5.1 11.32,16.45 11.12,16.25 J1.15
  Top 0.3: EPD_C5.1 11.74,16.6 13.4,16.6 v13.8,17 | J1.15 10.64,16.24 10.64,15.74 | L5.2 11.81,33.79 12.8,32.8 12.8,31.1 13.1,30.8 Q1.3 14.6,30 15,29.6 C1-EP-DR.1 v16.3,28.9
  Route15 0.3: v16.3,28.9 16.3,28.4 16.3,27.8 13.8,25.3 v13.8,17
EPD_BUSY  (via drill 0.3)
  Top 0.15: J1.9 10.68,19.2 12.7,19.2 13.2,19.7 13.2,22.1 15.1,24 19.5,24 21,22.5 22.2,22.5 24.4,20.3 v24.9,20.3 | v24.2,18.6 24.2,16.8 25.25,15.75 27.45,15.75 U1.P$AD12
  Bottom 0.15: v24.9,20.3 24.9,19 24.5,18.6 v24.2,18.6
EPD_CS  (via drill 0.2, 0.3)
  Top 0.15: J1.12 12.95,17.75 14.1,18.9 14.1,21.8 15.4,23.1 19.1,23.1 20.6,21.6 21.9,21.6 23.2,20.3 23.2,8.7 24.7,7.2 37.5,7.2 v37.7,7.4 | v38.7,13.2 38.3,13.2 37.5,14 37.5,16.3 v37.4,16.4 | v37.7,11.9 v37.7,9.1
  Bottom 0.15: v37.4,16.4 37.2,16.6 37.2,18 35.9,19.3 32.2,19.3 31.7,18.8 U1.P$K2 | v37.7,9.1 v37.7,7.4 | v38.7,13.2 38.7,12.9 v37.7,11.9
  other vias: 31.7,18.75
EPD_DC
  Top 0.15: J1.11 13.05,18.25 13.8,19 13.8,21.9 15.3,23.4 19.2,23.4 20.7,21.9 22,21.9 24.7,19.2 24.7,17.7 26,16.4 26.5,16.4 26.7,16.6 26.7,16.9 26.9,17.1 27.6,17.1 U1.P$AD10
EPD_RST  (via drill 0.2, 0.3)
  Top 0.15: J1.10 13.15,18.75 13.5,19.1 13.5,22 15.2,23.7 19.3,23.7 20.8,22.2 22.1,22.2 25.6,18.7 v25.8,18.7 | v24.7,17 25.6,16.1 26.8,16.1 v27.2,16.5
  Bottom 0.15: v27.2,16.5 U1.P$AC11
  Bottom 0.152: v25.8,18.7 25.3,18.7 24.7,18.1 v24.7,17
  other vias: 28.45,16.5
GDR
  Top 0.15: R2_EP_DR.2 10.97,25.45 Q3.1 11.75,23.05 11.45,22.75 J1.2
GND  (via drill 0.2, 0.3)  (1 unrouted)
  Top 0.15: IC3.8 IC3.9 C19.2 | 44.7,27.7 TP_GND.TP | J2.5 J2.3 17.8,12.25 17.8,8.7 TP_BAT_GND.TP v19.8,8.4 | EPD_C2.2 EPD_C1.2 12.6,20.4 v12,19.8 | v11.6,15.95 11.6,15.8 11.05,15.25 J1.17 | C4.2 C22.2 | X1.4 34.67,10.88 35.83,9.72 X1.2 | C2.2 36.48,9.72 X1.2 | C1.2 34.8,8.6 | 34.8,8.6 X1.2 | C9.2 30.89,11.25 C3.2 | C29.1 v31.8,5.1 | C31.1 v21,5.1 | C30.1 v9.9,5 | IC2.B3 v3.6,6 | v6.2,6 IC2.B1 | C42.1 v26.6,24.3 27.4,24.3 C43.2 | 36.1,16.2 v36.6,16.7 | C11.1 33.2,10.2 33.19,10.12 v33.2,10.1 | 34.8,8.6 v35.7,8.6 | IC9.B1 IC9.C1 IC9.C2 IC9.C3 v33.9,31.8
  Top 0.152: v31.7,25.48 31.62,25.4 IC1.D2 30.88,25.48 C37.1 | C38.1 v28.9,24.3 | C23.1 v32.1,29.6
  Top 0.3: U3.9 41.6,27.1 42,27.5 42,28.7 42.4,29.1 43.5,29.1 44.5,28.1 TP_GND.TP | U3.4 39.85,27.35 40.1,27.1 U3.9 | U3.6 40.35,26.85 U3.9 | C39.2 31,29 31.6,29.6 v32.1,29.6 | C15.2 36.1,16.2
  other vias: 10.62,19.75 34.16,20 33.95,17.5 31.14,8.1 35.3,4.27 24.5,4.27 13.4,4.27 16.3,30.6 28.4,20.4 32.55,23.3 35.14,23.3 26.48,27.8 24.6,26.55 27.4,12.64 36.7,31.2 35.7,33.3 14,27.77 15.7,25.74 13.8,15.7 13.8,14.8 13.8,13.9 13.8,12.9 13,10.8 11.9,10.7 9.8,10 37.9,25.64 40.6,27.1 19.8,28.98 21.2,27.43 26.2,28.98 34.8,18.45 36.36,18 35,14.25 35,13.14 31,28.1 32.7,13.25 10.7,26.27
  pour Top: 47.18,-0.88 47.18,12.68 41.58,12.68 41.53,12.7 41.5,12.73 41.48,12.78 41.48,20.32 41.5,20.37 41.53,20.4 41.58,20.42 46.58,20.42 46.58,35.98 -1.08,35.98 -1.08,-0.88
  pour Route2: 47.18,-0.78 47.18,12.68 41.58,12.68 41.53,12.7 41.5,12.73 41.48,12.78 41.48,20.32 41.5,20.37 41.53,20.4 41.58,20.42 46.58,20.42 46.58,35.98 -1.18,35.98 -1.18,-0.78
  pour Bottom: 46.98,-0.58 46.98,12.68 41.58,12.68 41.53,12.7 41.5,12.73 41.48,12.78 41.48,20.42 41.5,20.47 41.53,20.5 41.58,20.52 46.38,20.52 46.38,36.08 -1.58,36.08 -1.58,-0.58
HAPTIC_EN  (via drill 0.3)
  Top 0.15: v30.5,22.6 30.5,22.1 30.1,21.7 30.1,19.4 U1.P$U1 | IC2.A1 7.8,5.5 10.2,7.9 13.1,7.9 14.5,6.5 23.4,6.5 24.3,5.6 40.8,5.6 v42.6,7.4 | v42.6,9.1 42.6,10.2 41.5,11.3 v41.5,11.6 | v39.7,12.2 39.3,12.6 39.3,23 v39.4,23.1
  Bottom 0.15: v30.5,22.6 30.5,23.4 31.6,24.5 32.1,24.5 33,25.4 33,27.7 33.1,27.8 38.8,27.8 39,27.6 39,23.5 v39.4,23.1 | v42.6,7.4 v42.6,9.1 | v41.5,11.6 40.9,12.2 v39.7,12.2
IMU_INT1
  Top 0.15: IC3.5 36.25,24.43 36.02,24.2 31.9,24.2 31.05,23.35 31.05,19.35 U1.P$N1
IMU_INT2  (via drill 0.2, 0.3)
  Top 0.15: IC3.6 36.75,24.45 36.2,23.9 32,23.9 31.5,23.4 v31.5,22.7 | v30.6,21.4 v30.6,19.8
  Bottom 0.15: v31.5,22.7 30.6,21.8 v30.6,21.4
  Bottom 0.152: v30.6,19.8 30.6,18.85 U1.P$P2
  other vias: 30.7,18.75
LX1
  Top 0.152: IC9.B2 IC9.B3 33.5,31.7 33.3,31.9 33,31.9 32.47,32.43 L7.1
LX2
  Top 0.152: IC9.D2 IC9.D3 34.3,31.5 34.6,31.8 34.6,33.33 L7.2
MOSI  (via drill 0.2, 0.3)
  Top 0.15: v39.6,7.4 38.8,6.6 24.5,6.6 22.6,8.5 22.6,20.1 21.7,21 20.3,21 18.8,22.5 15.7,22.5 14.7,21.5 14.7,18.7 13,17 11.4,17 11.15,16.75 J1.14 | v39.6,9.1 39.6,11.3 36.3,14.6 36.3,14.9 v35.7,15.5
  Bottom 0.15: v39.6,9.1 v39.6,7.4 | v35.7,15.5 35.2,16 U1.P$B13
  other vias: 33.95,16
N$1
  Top 0.152: IC1.D1 31.62,25 R9.2
N$3
  Top 0.15: IC9.D1 34.3,29.8 34.17,29.68 R4.2
N$4
  Top 0.152: R2.2 34.8,30.2 IC9.E1
N$5
  Top 0.152: R3.2 IC3.1
N$8
  Top 0.15: U1.P$AC5 28.3,18.15 28.3,19.3 C20.1
N$15
  Top 0.15: C17.2 35.66,22 X2.1 35.25,21.7 34.05,20.5 33.4,20.5 33.1,20.2 33.1,18.85 U1.P$D2
N$17
  Top 0.152: C18.2 33.05,21.91 X2.2 32.8,21.7 32.8,18.85 U1.P$F2
N$18
  Top 0.152: U1.P$Y2 29.45,19 U1.P$W1 29,19.7 29,21 C6.1
N$20
  Top 0.15: C7.2 36.16,19.64 C14.2
N$21
  Top 0.152: C14.1 34.6,19.6 34.6,19.5 34.2,19.5 U1.P$B1
N$22
  Top 0.152: U1.P$B3 33.95,18.7 34.45,19.2 37.05,19.2 L2.1
N$23
  Top 0.152: L2.2 L3.1
N$24  (via drill 0.3)
  Top 0.152: C15.1 35.84,17.2 C16.1 35.79,17.95 C10.1 34.74,18 U1.P$B5 | C15.1 v35.1,17.2 | L3.2 37.05,17.2 C15.1 | v32.6,9.2 32.6,10.4 32.9,10.7 32.9,11.3 32.7,11.5 32.7,12.5 U1.P$E24
  Bottom 0.152: v35.1,17.2 35.1,16.6 35.7,16 36.1,16 36.8,15.3 38.2,15.3 39.4,14.1 39.4,12.8 38.1,11.5 38.1,10.4 36.7,9 36.7,8.2 36.1,7.6 33,7.6 32.6,8 v32.6,9.2
N$25
  Top 0.152: U1.P$B24 33.95,11.85 33.7,11.6 33.7,8.85 C1.1 33.95,9.2 X1.1
N$26
  Top 0.152: U1.P$A23 34.45,12.25 35,11.7 36.9,11.7 37.1,11.5 C2.1 37.08,10.88 X1.3
N$27
  Top 0.152: U1.P$D23 33.5,12.95 33.5,12.55 C11.2
N$28  (via drill 0.3)
  Top 0.152: L1.1 31.66,10.75 C3.1 31.9,11.5 v32.4,11 | v31.3,13.2 31.35,13.25 U1.P$H23
  Bottom 0.152: v32.4,11 32.4,11.8 32.1,12.1 31.6,12.1 31.3,12.4 v31.3,13.2
N$29
  Top 0.152: L1.2 31.6,8.96 C4.1 C22.1 42.9,8.1 44.2,9.4 ANT1.1
N$30
  Top 0.15: C9.1 30.4,12.2 U1.P$N24
N$31
  Top 0.15: C2-EP-DR.2 5.9,31.7 D5.2 6.66,30.35 7.8,29.21 L5.1 10.74,29.21 Q3.3
N$32
  Top 0.15: C2-EP-DR.1 3.9,31.7 D2.1 3.8,30.55 D4.2
N$36
  Top 0.15: EPD_C1.1 11,21.2 10.68,21.2
  Top 0.152: 10.68,21.2 J1.5
N$39
  Top 0.152: C13.1 U1.P$A18
N$41
  Top 0.15: R1_EP_DR.1 R_TYPE_SEL.2 15.66,27.23 SJ1.2
N$42
  Top 0.15: EPD_C2.1 11.35,21.75 J1.4
N$52
  Top 0.152: C32.2 4.91,5.48 IC2.A2
N$57
  Top 0.152: J4.B5 21.25,28.04 R2_USB.1
N$62
  Top 0.152: R1_USB.2 24.82,27.8 24.25,28.38 J4.A5
N$64
  Top 0.15: EPD_C6.1 12.3,15.2 11.5,15.2 11.2,14.9 11.2,14.8 11.15,14.75 J1.18
N$65
  Top 0.15: J1.19 11.1,14.25 11.65,14.8 EPD_C7.1
N$66
  Top 0.15: EPD_C8.1 12.7,13.8 10.68,13.8 J1.20
N$68
  Top 0.15: EPD_C10.1 12.5,12.3 12,12.3 11.55,12.75 J1.22
N$70
  Top 0.15: EPD_C12.1 10.8,10.2 11.1,10.5 11.1,11.4 10.75,11.75 J1.24
OUT+
  Top 0.3: IC2.A3 4.4,5.2 TP_OP.TP
OUT-
  Top 0.3: IC2.C3 4.4,7.4 TP_ON.TP
P0.13  (via drill 0.3)
  Top 0.15: SW_UP.2 10.6,5.1 11.4,5.9 v22.8,5.9 | v24.1,8.9 24.1,9.2 23.8,9.5 23.8,14.5 24.2,14.9 v24.2,15.3 | U1.P$AD8 27.8,17.4 26,17.4 v25.9,17.5
  Top 0.152: SW_UP.2 10.44,4.12 C30.2 R5.1
  Bottom 0.15: v22.8,5.9 22.8,7.6 v24.1,8.9 | v24.2,15.3 24.2,15.8 v25.9,17.5
P0.14  (via drill 0.2, 0.3)
  Top 0.15: 22.8,5.3 22,5.3 21.7,5 SW_ENT.2 21.54,4.12 C31.2 | v25.1,8 25.1,8.6 24.1,9.6 24.1,14.4 24.4,14.7 v24.8,14.7
  Top 0.152: R8.1 C31.2 | v23.8,5.4 22.9,5.4 22.8,5.3
  Bottom 0.15: v24.8,14.7 25.7,14.7 26.5,15.5 26.5,16.7 26.8,17 U1.P$AC9
  Bottom 0.152: v23.8,5.4 23.8,5.7 25.1,7 v25.1,8
  other vias: 28.45,17
P1.01  (via drill 0.2, 0.3)
  Top 0.15: R_PWR_EPD.1 16.88,33.38 16.4,32.9 Q1.1 16.25,32.2 16.6,32.2 17.4,31.4 17.4,25.2 18.3,24.3 19.6,24.3 21.1,22.8 22.3,22.8 23.8,21.3 v24.3,21.3
  Top 0.152: v23.7,16.3 23.5,16.1 23.5,8.8 24.8,7.5 28.1,7.5 28.9,8.3 v28.9,10.9
  Bottom 0.15: v24.3,21.3 24.3,20.1 23.7,19.5 v23.7,16.3
  Bottom 0.152: v28.9,10.9 28.9,13 29.2,13.3 U1.P$Y23
  other vias: 29.2,13.25
P1.02  (via drill 0.3)
  Top 0.15: R7.1 30.52,4.12 v30.5,4.1 | v29.8,7.7 29.8,9.2 29.45,9.55 U1.P$W24
  Top 0.152: R7.1 C29.2 32.34,4.12 SW_DN.2
  Bottom 0.15: v29.8,7.7 29.8,4.8 v30.5,4.1
PMIC_INT  (via drill 0.2, 0.3)
  Top 0.15: IC1.A1 29.5,24.9 29.5,19.9 v29.6,19.8
  Bottom 0.15: v29.6,19.8 30.2,19.2 U1.P$T2
  other vias: 30.2,18.75
PREVGH
  Top 0.3: EPD_C9.1 12.45,13.25 J1.21 10.61,13.24 10.16,13.24 9.9,13.5 9.9,24.6 9.1,25.4 6.2,25.4 5.9,25.7 D5.1
PREVGL
  Top 0.3: EPD_C11.1 11.35,12.25 J1.23 9.95,12.25 9.4,12.8 9.4,24.4 8.9,24.9 4.7,24.9 3.9,25.7 D2.2
RESE
  Top 0.15: R1_EP_DR.2 13.82,25.45 Q3.2 13.05,22.65 12.6,22.2 10.68,22.2
  Top 0.152: 10.68,22.2 J1.3
RESET  (via drill 0.2, 0.3)
  Top 0.15: J2.6 19.99,14.79 21.1,15.9 21.1,19.1 TP_RESET.TP 21.8,18.4 v21.8,17.4
  Bottom 0.15: v21.8,17.4 21.8,16.1 23.7,14.2 25.9,14.2 27.2,15.5 28,15.5 28.5,16 U1.P$AC13
  other vias: 28.45,16
SCK  (via drill 0.3)
  Top 0.15: J1.13 10.72,17.35 12.95,17.35 14.4,18.8 14.4,21.7 15.5,22.8 18.9,22.8 20.4,21.3 21.8,21.3 22.9,20.2 22.9,8.6 24.6,6.9 38.2,6.9 v38.7,7.4 | v38.7,9.1 38.7,11.8 34.9,15.6 34.9,16 34.65,16.25 U1.P$A12
  Bottom 0.15: v38.7,9.1 v38.7,7.4
SCL  (via drill 0.2, 0.3)
  Top 0.15: 30,24.1 30.3,23.8 30.8,23.8 31.5,24.5 31.9,24.5 32.2,24.8 32.2,26.5 31.7,27 31.7,27.75 31.82,27.88 R17.2 32.2,28.38 32.95,29.12 R4.1 33.81,29.11 33.8,29.1 v33.8,27.3 | IC1.B1 30,24.1 | IC3.12 36.25,26.75 36.4,26.9 v37.5,26.9 38.1,26.9 38.4,27.2 38.4,30.1 TP_SCL.TP 39,30.7 39,24.6 39.4,24.2 39.9,24.2 40.05,24.35 40.05,24.95 40.85,25.75 U3.7 40.9,26.06 40.9,25 40.6,24.7 v40.6,9.1 | 30,24.1 v30,23.3 | IC2.C1 7.4,8.5 13.4,8.5 14.8,7.1 23.6,7.1 24.45,6.25 39.45,6.25 v40.6,7.4
  Bottom 0.15: v37.5,26.9 34.2,26.9 v33.8,27.3 | v30,23.3 30,21.1 30.5,20.6 31.6,20.6 32.1,20.1 32.1,19.75 31.2,18.85 U1.P$M2 | v40.6,7.4 v40.6,9.1
  other vias: 31.2,18.75
SDA  (via drill 0.2, 0.3)
  Top 0.15: IC3.2 34.73,25.65 34.5,25.88 | v30.8,24.5 30.4,24.9 IC1.C1 | v31.5,19.8 31.45,19.75 U1.P$L1 | v7.2,7.6 7.8,8.2 13.2,8.2 14.6,6.8 23.5,6.8 24.4,5.9 40.1,5.9 v41.6,7.4 | v41.6,9.1 41.6,10.5 40.9,11.2 40.9,24.6 41.35,25.05 U3.8 | U3.8 41.44,26.2 43.3,26.2 TP_SDA.TP | U3.8 41.35,26.25 42.7,27.6 v42.7,28.2 | v37.6,29.6 37.23,29.23 R18.2 R2.1 v34.8,28.4
  Top 0.152: 34.5,25.88 34.5,27.4 34.8,27.7 35.2,27.7 35.6,28.1 R18.2
  Bottom 0.15: v31.5,19.8 31,20.3 29.5,20.3 29.3,20.5 29.3,23.5 29.6,23.8 30.1,23.8 v30.8,24.5 30.9,24.5 31.2,24.8 32,24.8 32.7,25.5 32.7,28.12 32.98,28.4 v34.8,28.4 | IC2.B2 5.5,6 7.1,7.6 v7.2,7.6 | v41.6,7.4 v41.6,9.1 | v42.7,28.2 42.7,29.3 42,30 38,30 v37.6,29.6
  other vias: 4.9,6
SWDCLK  (via drill 0.3)
  Top 0.15: v19.4,13.8 19.35,13.8 J2.4 17.8,15.35 17.8,19.9 17.8,20.5 TP_SWDCLK.TP | v25.1,13.7 24.4,13 24.4,9.7 25.6,8.5 25.6,8 25.8,7.8 28,7.8 28.6,8.4 28.6,10.4 28.4,10.6 28.4,11.1 28.95,11.65 U1.P$AA24
  Bottom 0.15: v19.4,13.8 20.4,13.8 20.5,13.9 24.9,13.9 v25.1,13.7
SWDIO  (via drill 0.3)
  Top 0.15: TP_SWDIO.TP 14.6,17.4 14.6,15.5 15.4,14.7 16.6,14.7 16.87,14.44 J2.2 17.46,14.44 v18.1,13.8 | v25.1,12.8 25.1,12.6 24.7,12.2 24.7,9.8 25.9,8.6 25.9,8.3 26.1,8.1 27.8,8.1 28.3,8.6 28.3,10.3 28.1,10.5 28.1,11.2 28.45,11.55 U1.P$AC24
  Bottom 0.15: v18.1,13.8 18.6,13.3 20.5,13.3 20.8,13.6 24.2,13.6 25,12.8 v25.1,12.8
SWO
  Top 0.15: TP_SWO.TP 27,10.9 28,11.9 28,12.8 28.4,13.2 28.4,13.5 28.15,13.75 U1.P$AD22
VBAT  (via drill 0.3)
  Top 0.24: U3.3 U3.2 40.85,29.13 C27.2 40.91,29.62 | IC1.C2 30.4,26.09 C37.2 30.52,26.71 30.9,27.1 v31,27.1
  Top 0.3: 40.91,29.62 42.5,31.2 TP_VBAT.TP | v39.8,29.5 39.8,29.4 40.35,28.85 U3.3
  Route15 0.3: v31,27.1 32.2,28.3 34,28.3 34.7,27.6 36.7,27.6 38.6,29.5 v39.8,29.5
VBUS
  Top 0.24: IC1.A2 29.59,25.38 C38.2 28.88,25.4 C43.1 27.48,25.38 C42.2 25.18,25.38 24.6,24.8 | D3.5 24.6,24.8 | 24.6,24.8 24,25.4 21.6,25.4 20.6,26.4 J4.A9_B4
  Top 0.28: U1.P$AD2 27.65,19.05
  Top 0.3: J4.A4_B9 25.4,29.5 24.6,30.3 21.4,30.3 20.6,29.5 J4.A9_B4 | 27.65,19.05 27.65,21.15 C21.1 27.1,21.2 26.8,21.5 26.8,23.3 27.3,23.8 28,23.8 28.3,24.1 28.3,24.6 C43.1
VREG
  Top 0.24: IC9.A3 IC9.A2 IC9.A1 33.1,29.62 C23.2
  Top 0.3: C39.1 30,29.2 31.1,30.3 C24.2 IC9.A1 | IC1.B2 C39.1 | C39.1 29.3,28.1 28.3,27.1 TP_VREG.TP